# Altium PCB motherboardfutong.PcbDoc
Units mil, origin at the board's own origin, x right, y up, seen from the top; angles counter-clockwise.
Board outline 6000 x 4000 mil, 2 copper layers (Top Layer, Bottom Layer); 46 components, 53 nets, 314 pads, 70 vias.
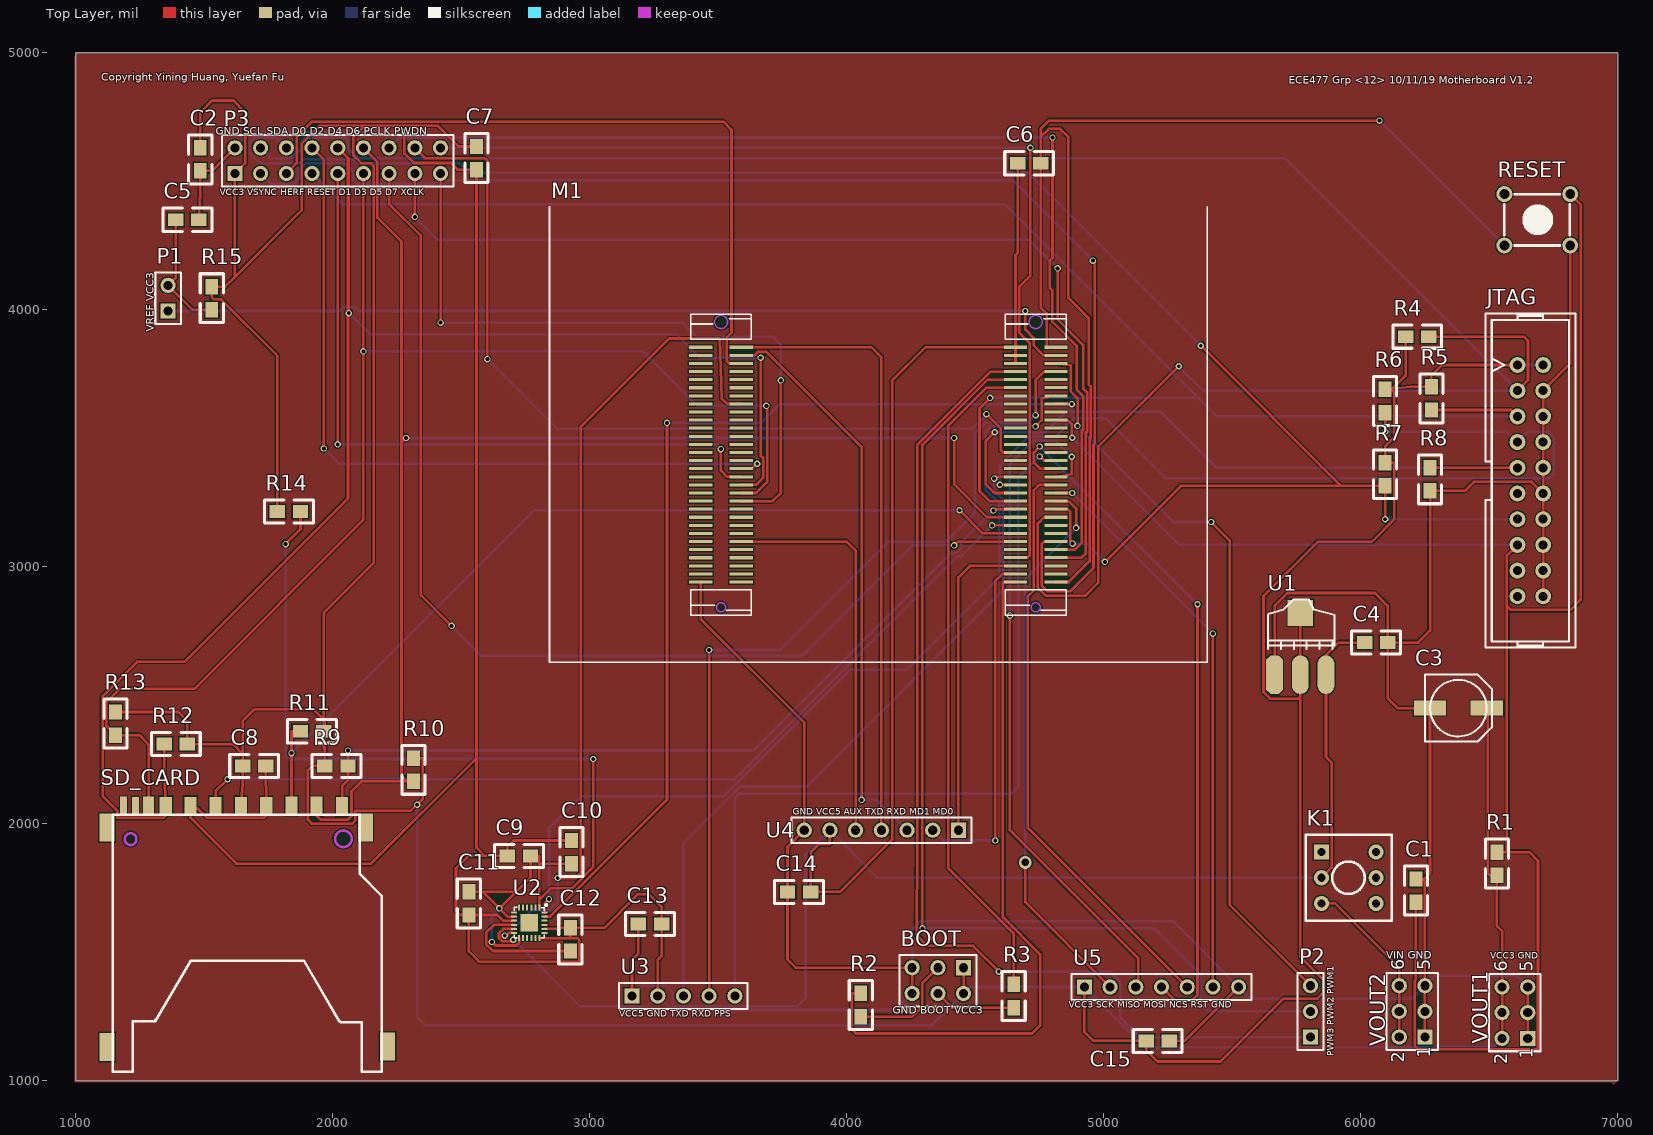
[diagram p0: Top Layer view]
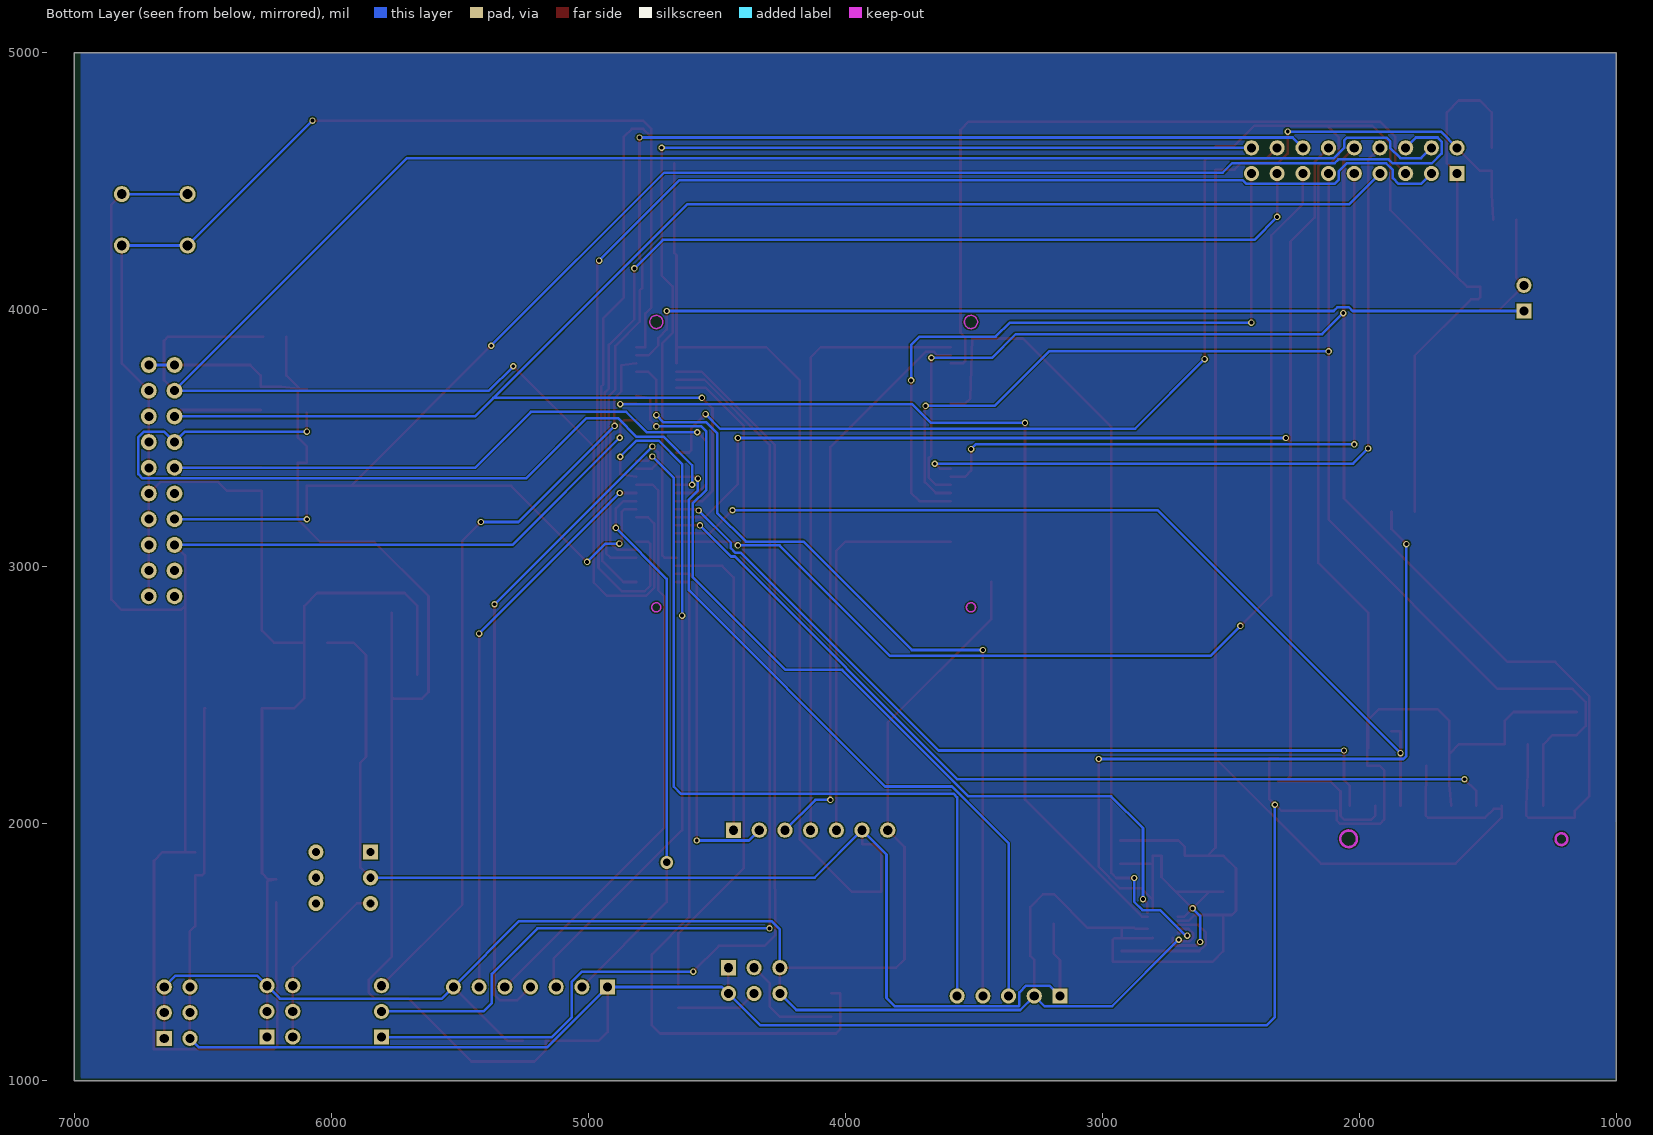
[diagram p1: Bottom Layer view, seen from below]

## Layer stack, top to bottom
Top Solder: solder mask 0.4, Solder Resist, Dk 3.5
Top Layer: signal copper 1.4
Dielectric 1: dielectric 12.6, FR-4, Dk 4.8
Bottom Layer: signal copper 1.4
Bottom Solder: solder mask 0.4, Solder Resist, Dk 3.5

## Board outline
1000,1000 7000,1000 7000,5000 1000,5000

## Design rules (kind name [scope] priority, off if disabled: settings)
Clearance [All] p1: gap=5 ignorepadtopadclearanceinfootprint=TRUE except(0: Arc-Hole Track-Hole SMDPad-Hole THPad-Hole Via-Hole Fill-Hole Poly-Hole Region-Hole Text-Hole)
ComponentClearance [All] p1: gap=6 collisioncheckmode=3 verticalgap=10 showdistances=FALSE
ParallelSegment ParallelSegment_2 [InNetClass('dcmi') vs InNetClass('dcmi')] p1: limit=10000 gap=10
ParallelSegment ParallelSegment_1 [InNetClass('sdio') vs InNetClass('sdio')] p2: limit=10000 gap=10
ParallelSegment [InNetClass('spi') vs InNetClass('spi')] p3: limit=10000 gap=10
PolygonConnect [All] p1: connectstyle=Relief reliefconductorwidth=10 reliefentries=4 polygonreliefangle="90 Angle" airgapwidth=10
RoutingVias [All] p1: holewidth=15 width=25 viastyle="Through Hole" minholewidth=15 minwidth=25 maxholewidth=15 maxwidth=25
SolderMaskExpansion [All] p1: expansion=4
Width [All] p1: maxlimit=10 minlimit=10 preferedwidth=10
29 further rules are at their usual default settings.

## Components (designator, comment, footprint, x,y, rotation, side; value= is the part's Value field where it differs from the comment)
BOOT "BOOT" HDR2X3 4455,1440 r180 top
C1 "104" 0805 6214.94,1695 r90 top
C2 "104" 0805 1484.94,4540 r90 top
C3 "220uF" CC6.56.5 6380,2450 r180 top
C4 "104" 0805 6015,2705.06 r0 top
C5 "6pF" 0805 1480,4350 r180 top
C6 "104" 0805 4755,4569.94 r180 top
C7 "104" 0805 2560.06,4635 r270 top
C8 "104" 0805 1740,2224.94 r180 top
C9 "104" 0805 2680,1875 r0 top
C10 "104" 0805 2930.06,1935 r270 top
C11 "104" 0805 2530,1645 r90 top
C12 "104" 0805 2925.06,1595 r270 top
C13 "104" 0805 3280,1609.94 r180 top
C14 "104" 0805 3770,1735.06 r0 top
C15 "104" 0805 5165,1155.06 r0 top
JTAG "JTAG" JTAG_20 6660,3335 r270 top
K1 "BUTTON" BTN8.5*8.5 5847.4,1890 r0 top
M1 "STM32F4&F7_CB" STM32F4&F7_CB 4814.39,3854.02 r180 top
P1 "VREF_SEL" HDR1X2 1360,3995 r90 top
P2 "PWM" HDR1X3 5805,1170 r90 top
P3 "OV5640" HDR2X9 1620,4530 r0 top
R1 "0R" 0805 6530,1890 r270 top
R2 "10K" 0805 4055.06,1340 r270 top
R3 "10K" 0805 4649.94,1285 r90 top
R4 "10K" 0805 6175,3895.06 r0 top
R5 "10K" 0805 6275.06,3700 r270 top
R6 "10K" 0805 6095,3690 r270 top
R7 "10K" 0805 6095.06,3405 r270 top
R8 "10K" 0805 6269.94,3295 r90 top
R9 "47K" 0805 2060,2224.94 r180 top
R10 "47K" 0805 2314.94,2165 r90 top
R11 "47K" 0805 1875,2360 r0 top
R12 "47K" 0805 1345,2310.06 r0 top
R13 "47K" 0805 1154.94,2345 r90 top
R14 "10R" 0805 1875,3215 r180 top
R15 "10R" 0805 1530,4000 r90 top
RESET "KEY_M" KEY_M 6559.09,4450 r0 top
SD_CARD "sd card" SDCARD_L 1938,2070 r0 top
U1 "AMS1117-3.3" AMS1117 5664.97,2580.06 r0 top
U2 "MPU9250" QFN24-t 2804.5,1674 r270 top
U3 "GPS" HDR1X5 3165,1330 r0 top
U4 "AS61-T17" HDR1X7 4435,1975 r180 top
U5 "ESP8266SPI" HDR1X7 4925,1365 r0 top
VOUT1 "VCC3.3" HDR2X3 6650,1165 r90 top
VOUT2 "VCC5" HDR2X3 6250,1170 r90 top

## Footprints (in the part's own frame and the unit in brackets; to place one, negate y for a bottom-side part, rotate by r counter-clockwise, add the part's x,y. Pads: shape width x height; smd on the part's side, far side on the other; paste and mask are expansions set on the pad)
0805 [mil]
  rect 60x50 smd: 1(0,-0.06) 2(90,-0.06)
  silkscreen extent -50,-45 140,45
AMS1117 [mil]
  oct 65x150 smd: 1(0.03,-0.06)
  oval 65x150 smd: 2(100.03,-0.06) 3(200.03,-0.06)
  rect 100x100 smd: 4(100.03,239.94)
  silkscreen extent -26,100 234,293
BTN8.5*8.5 [mm]
  rect 1.5x1.5 hole 0.8: 1(0,0)
  round 1.5 hole 0.8: 2(0,-2.54) 3(0,-5.08) 4(5.4,-5.08) 5(5.4,-2.54) 6(5.4,0)
  silkscreen extent -1.55,-6.79 6.95,1.71
CC6.56.5 [mm]
  rect 3.2x1.5 smd: 1(-2.794,0) 2(2.8,0)
  silkscreen extent -3.3,-3.3 3.3,3.3
HDR1X2 [mm]
  rect 1.5x1.5 hole 0.9: 1(0,0)
  round 1.5 hole 0.9: 2(2.54,0)
  silkscreen extent -1.27,-1.27 3.81,1.27
HDR1X3 [mm] "Connector; Header; 3 Position"
  rect 1.5x1.5 hole 0.9: 1(0,0)
  round 1.5 hole 0.9: 2(2.54,0) 3(5.08,0)
  silkscreen extent -1.27,-1.27 6.35,1.27
HDR1X5 [mm] "Connector; Header; 5 Position"
  rect 1.5x1.5 hole 0.9: 1(0,0)
  round 1.5 hole 0.9: 2(2.54,0) 3(5.08,0) 4(7.62,0) 5(10.16,0)
  silkscreen extent -1.27,-1.27 11.43,1.27
HDR1X7 [mm] "Connector; Header; 7 Position"
  rect 1.5x1.5 hole 0.9: 1(0,0)
  round 1.5 hole 0.9: 2(2.54,0) 3(5.08,0) 4(7.62,0) 5(10.16,0) 6(12.7,0) 7(15.24,0)
  silkscreen extent -1.27,-1.27 16.51,1.27
HDR2X3 [mm]
  rect 1.5x1.5 hole 0.9: 1(0,0)
  round 1.5 hole 0.9: 2(0,2.54) 3(2.54,0) 4(2.54,2.54) 5(5.08,0) 6(5.08,2.54)
  silkscreen extent -1.27,-1.27 6.35,3.81
HDR2X9 [mm]
  rect 1.5x1.5 hole 0.9: 1(0,0)
  round 1.5 hole 0.9: 2(0,2.54) 3(2.54,0) 4(2.54,2.54) 5(5.08,0) 6(5.08,2.54) 7(7.62,0) 8(7.62,2.54) 9(10.16,0) 10(10.16,2.54) 11(12.7,0) 12(12.7,2.54) 13(15.24,0) 14(15.24,2.54) 15(17.78,0) 16(17.78,2.54) 17(20.32,0) 18(20.32,2.54)
  silkscreen extent -1.27,-1.27 21.59,3.81
JTAG_20 [mil]
  round 62 hole 35: 1(-450,-50) 2(-450,50) 3(-350,-50) 4(-350,50) 5(-250,-50) 6(-250,50) 7(-150,-50) 8(-150,50) 9(-50,-50) 10(-50,50) 11(50,-50) 12(50,50) 13(150,-50) 14(150,50) 15(250,-50) 16(250,50) 17(350,-50) 18(350,50) 19(450,-50) 20(450,50)
  silkscreen extent -650,-175 650,175
KEY_M [mil]
  round 62 hole 38: 1(0,0) 1(255.91,0) 2(0,-200) 2(255.91,-200)
  silkscreen extent 0,-200 255,0
QFN24-t [mm]
  rrect50% 0.6x0.2 smd: 1(0,0) 2(0,-0.4) 3(0,-0.8) 4(0,-1.2) 5(0,-1.6) 6(0,-2) 13(3,-2) 14(3,-1.6) 15(3,-1.2) 16(3,-0.8) 17(3,-0.4) 18(3,0)
  rrect50% 0.2x0.6 smd: 7(0.5,-2.5) 8(0.9,-2.5) 9(1.3,-2.5) 10(1.7,-2.5) 11(2.1,-2.5) 12(2.5,-2.5) 19(2.5,0.5) 20(2.1,0.5) 21(1.7,0.5) 22(1.3,0.5) 23(0.9,0.5) 24(0.5,0.5)
  rect 1.7x1.7 smd: 25(1.499,-1.003)
  silkscreen extent -0.36,-2.5 3,0.76
SDCARD_L [mm]
  rect 1.2x1.8 smd: 1(0,0) 2(-2.489,0) 3(-4.983,-0.009) 4(-7.483,-0.009) 5(-9.983,-0.009) 6(-12.483,-0.009) 7(-14.908,-0.009) 9(2.517,-0.009)
  rect 1.1x1.8 smd: 8(-16.612,0)
  rect 0.7x1.8 smd: 10(-17.908,-0.009) 12(-19.101,0)
  rect 1.5x2.8 smd: 11(-20.726,-23.834) 11(-20.726,-2.143) 11(4.826,-2.143) 11(7.01,-23.784)
  Keep-Out Layer circle w0.254: c2.642,-3.26 r0.82
  Keep-Out Layer circle w0.254: c-18.39,-3.3 r0.58
  silkscreen extent -20.13,-26.3 6.44,-0.9
STM32F4&F7_CB [mm]
  rect 2.3x0.3 smd: J1_1(0,0) J1_2(0,0.8) J1_3(0,1.6) J1_4(0,2.4) J1_5(0,3.2) J1_6(0,4) J1_7(0,4.8) J1_8(0,5.6) J1_9(0,6.4) J1_10(0,7.2) J1_11(0,8) J1_12(0,8.8) J1_13(0,9.6) J1_14(0,10.4) J1_15(0,11.2) J1_16(0,12) J1_17(0,12.8) J1_18(0,13.6) J1_19(0,14.4) J1_20(0,15.2) J1_21(0,16) J1_22(0,16.8) J1_23(0,17.6) J1_24(0,18.4) J1_25(0,19.2) J1_26(0,20) J1_27(0,20.8) J1_28(0,21.6) J1_29(0,22.4) J1_30(0,23.2) J1_31(4,23.2) J1_32(4,22.4) J1_33(4,21.6) J1_34(4,20.8) J1_35(4,20) J1_36(4,19.2) J1_37(4,18.4) J1_38(4,17.6) J1_39(4,16.8) J1_40(4,16) J1_41(4,15.2) J1_42(4,14.4) J1_43(4,13.6) J1_44(4,12.8) J1_45(4,12) J1_46(4,11.2) J1_47(4,10.4) J1_48(4,9.6) J1_49(4,8.8) J1_50(4,8) J1_51(4,7.2) J1_52(4,6.4) J1_53(4,5.6) J1_54(4,4.8) J1_55(4,4) J1_56(4,3.2) J1_57(4,2.4) J1_58(4,1.6) J1_59(4,0.8) J1_60(4,0) J2_1(31.1,0.001) J2_2(31.1,0.801) J2_3(31.1,1.601) J2_4(31.1,2.401) J2_5(31.1,3.201) J2_6(31.1,4.001) J2_7(31.1,4.801) J2_8(31.1,5.601) J2_9(31.1,6.401) J2_10(31.1,7.201) J2_11(31.1,8.001) J2_12(31.1,8.801) J2_13(31.1,9.601) J2_14(31.1,10.401) J2_15(31.1,11.201) J2_16(31.1,12.001) J2_17(31.1,12.801) J2_18(31.1,13.601) J2_19(31.1,14.401) J2_20(31.1,15.201) J2_21(31.1,16.001) J2_22(31.1,16.801) J2_23(31.1,17.601) J2_24(31.1,18.401) J2_25(31.1,19.201) J2_26(31.1,20.001) J2_27(31.1,20.801) J2_28(31.1,21.601) J2_29(31.1,22.401) J2_30(31.1,23.201) J2_31(35.1,23.201) J2_32(35.1,22.401) J2_33(35.1,21.601) J2_34(35.1,20.801) J2_35(35.1,20.001) J2_36(35.1,19.201) J2_37(35.1,18.401) J2_38(35.1,17.601) J2_39(35.1,16.801) J2_40(35.1,16.001) J2_41(35.1,15.201) J2_42(35.1,14.401) J2_43(35.1,13.601) J2_44(35.1,12.801) J2_45(35.1,12.001) J2_46(35.1,11.201) J2_47(35.1,10.401) J2_48(35.1,9.601) J2_49(35.1,8.801) J2_50(35.1,8.001) J2_51(35.1,7.201) J2_52(35.1,6.401) J2_53(35.1,5.601) J2_54(35.1,4.801) J2_55(35.1,4.001) J2_56(35.1,3.201) J2_57(35.1,2.401) J2_58(35.1,1.601) J2_59(35.1,0.801) J2_60(35.1,0.001)
  Keep-Out Layer circle w0.152: c33.1,25.701 r0.45
  Keep-Out Layer circle w0.152: c33.1,-2.499 r0.65
  Keep-Out Layer circle w0.152: c2,-2.5 r0.65
  Keep-Out Layer circle w0.152: c2,25.7 r0.45
  silkscreen extent -14.95,-13.87 50.05,31.13

## Part data
BOOT VOUT1 VOUT2: library part "Header 3X2", "Header, 3-Pin, Dual row"
  VOUT1 VOUT2: LatestRevisionDate=17-Jul-2002, LatestRevisionNote="Re-released for DXP Platform.", Publisher="Altium Limited"
C1 C2 C4 C5 C6 C7 C8 C9 C10 C11 C12 C13 C14 C15: library part C
C3: library part CAP
M1: "F429/746 Core Board"
P1: library part "Header 2", "Header, 2-Pin"
P2: library part "Header 3", "Header, 3-Pin", LatestRevisionDate=17-Jul-2002, LatestRevisionNote="Re-released for DXP Platform.", Publisher="Altium Limited"
P3: library part "Header 9X2", "Header, 9-Pin, Dual row"
R1 R2 R3 R4 R5 R6 R7 R8 R9 R10 R11 R12 R13 R14 R15: library part R
U1: library part AMS1117
U2: "9轴运动处理传感器"
U3: library part "Header 5", "Header, 5-Pin", LatestRevisionDate=17-Jul-2002, LatestRevisionNote="Re-released for DXP Platform.", Publisher="Altium Limited"
U4 U5: library part "Header 7", "Header, 7-Pin", LatestRevisionDate=17-Jul-2002, LatestRevisionNote="Re-released for DXP Platform.", Publisher="Altium Limited"

## Via types
v1: diameter 25, hole 15, Top Layer to Bottom Layer, 69 vias
v2: diameter 50, hole 28, Top Layer to Bottom Layer, 1 vias

## Nets (pads, with @x,y where several pads share a name; then routed paths per layer and width w, separated by ;. In a path a pad name is that pad's centre, name@x,y a point inside that pad or via, vN(x,y) a via of type N, cw(c..) or ccw(c..) an arc to the next point about the centre after c; other vN are vias at no path point)
9D_INT: M1.J2_8 U2.12 | length 3227.8
  Top Layer w10: v1(2670,1565) 2676,1565 2686.57,1575.57 U2.12 ; v1(2876,1789) 2946,1789 2965,1808 2965,3544 3309,3888 3506,3888 3514,3655.5 3536,3633.5 M1.J2_8
  Bottom Layer w10: v1(2670,1565) 2676,1565 2775,1664 2844,1664 2876,1696 v1(2876,1789)
AS_AUX: M1.J2_25 U4.5 | length 1547.6
  Top Layer w10: M1.J2_25 4000,3098.07 4035,3063.07 U4.5
AS_MD0: M1.J1_33 U4.1 | length 1224.2
  Top Layer w10: U4.1 4435,2958.62 4480,3003.62 M1.J1_33
AS_MD1: M1.J1_32 U4.2 | length 1359.1
  Top Layer w10: v1(4578,1935) 4578,2944 4606.13,2972.13 M1.J1_32
  Bottom Layer w10: U4.2 4375,1935 v1(4578,1935)
AS_RXD: M1.J2_2 U4.3 | length 2225.6
  Top Layer w10: M1.J2_2 3641.46,3822.48 3654.92,3835.95 3687.98,3835.95 4058,3465.92 v1(4058,2093)
  Bottom Layer w10: v1(4058,2093) 4117,2093 U4.3
AS_TXD: M1.J2_1 U4.4 | length 2401.1
  Top Layer w10: M1.J2_1 4096,3853.98 4135,3814.98 U4.4
BOOT0: M1.J1_31 R2.1 | length 2761.5
  Top Layer w10: R2.1 4020,1340 4020,1200 4036,1184 4721,1184 4753,1216 4753,1492 4608,1637 4608,2940.63 M1.J1_31
BOOT1: M1.J1_55 R3.2 | length 2601.5
  Top Layer w10: R3.2 4650,1573 4395,1828 4395,3546.98 4544.55,3696.54 M1.J1_55
DCMI_D0: M1.J2_16 P3.8 | length 2969.6
  Top Layer w10: P3.8 1966,4584 v1(1966,3460) ; M1.J2_16 3632.54,3381.54 v1(3652,3401)
  Bottom Layer w10: v1(1966,3460) 2025,3401 v1(3652,3401)
DCMI_D1: M1.J2_17 P3.9 | length 2725.4
  Top Layer w10: v1(2020,3476) P3.9 ; v1(3511,3458) 3511,3374.04 3535,3350.04 M1.J2_17
  Bottom Layer w10: v1(2020,3476) 3493,3476 v1(3511,3458)
DCMI_D2: M1.J2_18 P3.10 R12.1 SD_CARD.7 | length 6467
  Top Layer w10: R12.1 1345,2196.07 SD_CARD.7 1351.07,2032 1343.07,2024 1162,2024 1162,2051 1105,2108 1105,2496 1239,2630 1424,2630 2060,3266 2060,4590 ; P3.10 2060,4590 ; v1(2063,3987) 2063,4587 2060,4590 ; M1.J2_18 3648,3318.54 3675.28,3345.82 3675.28,3423.26 3665,3433.53 v1(3665,3813)
  Bottom Layer w10: v1(2063,3987) 2145,3905 3337,3905 3429,3813 v1(3665,3813)
DCMI_D3: M1.J2_19 P3.11 R13.1 SD_CARD.8 | length 5238.3
  Top Layer w10: SD_CARD.8 1284,2309 1248,2345 R13.1 1120,2380 1120,2474 1171,2525 1462,2525 2120,3183 v1(2120,3838) P3.11 ; M1.J2_19 3648,3287.05 3690.28,3329.32 3690.28,3623.72 v1(3688,3626)
  Bottom Layer w10: v1(2120,3838) 3207,3838 3419,3626 v1(3688,3626)
DCMI_D4: M1.J1_39 P3.12 R10.1 SD_CARD.1 | length 5704.4
  Top Layer w10: SD_CARD.1 1938,2032 1955,2015 2058,2015 2073.47,2030.47 2073.47,2126.47 2112,2165 2288,2165 ; P3.12 2174.53,4575.47 2174.53,4358.47 2268,4265 2268,3483 ; v1(2286,3501) 2268,3483 ; R10.1 2288,2165 ; v1(4418,3501) 4418,3321.25 4546.65,3192.6 M1.J1_39 ; 2268,3483 2268,2185 2288,2165
  Bottom Layer w10: v1(2286,3501) v1(4418,3501)
DCMI_D5: M1.J1_36 P3.13 | length 4287.4
  Top Layer w10: P3.13 2220,4412 2343,4289 2343,2890 v1(2463,2770) ; v1(4418,3083) 4433.11,3098.11 M1.J1_36
  Bottom Layer w10: v1(2463,2770) 2580,2653 3826,2653 4256,3083 v1(4418,3083)
DCMI_D6: M1.J1_26 P3.14 | length 4345.9
  Top Layer w10: v1(4801,4670) 4801,4202 4791,4192 4791,4084 4800,4075 4800,3954 4895,3859 4895,3689.5 4920.5,3664 4920.5,3534 4915.5,3529 4915.5,3094 4888.11,3066.61 M1.J1_26
  Bottom Layer w10: P3.14 2260,4670 v1(4801,4670)
DCMI_D7: M1.J1_27 P3.15 | length 4034.9
  Top Layer w10: v1(2320,4361) P3.15 ; M1.J1_27 4914.43,3035.12 4930.5,3051.19 4930.5,3520.5 4935.5,3525.5 4935.5,3678.5 4920.5,3693.5 4920.5,3863.5 4821,3963 v1(4821,4161)
  Bottom Layer w10: v1(2320,4361) 2409,4272 4710,4272 v1(4821,4161)
DCMI_HREF: M1.J2_3 P3.5 | length 2855.9
  Top Layer w10: P3.5 1860,4570 1860,4672 1920,4732 3520,4732 3552,4700 3552,3911 3534,3893 3534,3800 3543.02,3790.98 M1.J2_3
DCMI_PCLK: M1.J1_47 P3.16 | length 3377.4
  Top Layer w10: P3.16 2360,4590 2592,4590 2602,4580 v1(2602,3808) ; v1(4544,3594) 4599,3539 4599,3453.57 4608,3444.57 M1.J1_47
  Bottom Layer w10: v1(2602,3808) 2873,3537 4487,3537 v1(4544,3594)
DCMI_PWDN: M1.J1_34 P3.18 | length 3974.8
  Top Layer w10: M1.J1_34 4704,3035.12 4712.19,3043.31 4712.19,3869.81 4672,3910 4672,4091 4715,4134 v1(4715,4630)
  Bottom Layer w10: P3.18 v1(4715,4630)
DCMI_RESET: JTAG.5 M1.J1_41 P3.7 R5.2 | length 6772.9
  Top Layer w10: v1(4558.14,3657) 4517.01,3615.87 4517.01,3294.99 4556.41,3255.59 M1.J1_41 ; R5.2 6585,3610 JTAG.5
  Bottom Layer w10: P3.7 2039,4411 4615,4411 5369,3657 ; v1(4558.14,3657) 5369,3657 ; JTAG.5 5441,3585 5369,3657
DCMI_SCL: JTAG.3 M1.J1_22 P3.4 R4.2 | length 8912.2
  Top Layer w10: M1.J1_22 4767.6,3192.6 4744,3169 4744,2918 4775,2887 4928,2887 4979,2938 4979,3467 v1(5292,3780) ; R4.2 6635,3895 6651,3879 6651,3726 JTAG.3
  Bottom Layer w10: P3.4 1760,4590 1840.94,4590 1880.47,4629.53 1880.47,4656 1894,4669.53 2048,4669.53 2059.53,4658 2059.53,4629.53 2099.06,4590 5705,4590 JTAG.3 5387,3685 v1(5292,3780)
DCMI_SDA: JTAG.13 M1.J1_21 P3.6 R7.2 | length 7200.8
  Top Layer w10: M1.J1_21 4860,3224.09 4869.67,3214.42 4869.67,3099.33 v1(4879,3090) ; v1(5005,3019) 5301,3315 5923,3315 ; v1(5378,3860) 5923,3315 ; v1(6095,3185) R7.2 5923,3315
  Bottom Layer w10: P3.6 1780,4670 1696,4670 1680,4654 1680,4608 1718,4570 1871,4570 1886,4585 2082,4585 2097,4570 2495,4570 2532,4533 4705,4533 v1(5378,3860) ; v1(4879,3090) 4934,3090 v1(5005,3019) ; v1(6095,3185) JTAG.13
DCMI_VSYNC: M1.J1_25 P3.3 | length 5163.9
  Top Layer w10: M1.J1_25 4768,3098.11 4759,3089.11 4759,2927 4780.5,2905.5 4870.5,2905.5 4960.5,2995.5 4960.5,3475.5 4965.5,3480.5 4965.5,4183.5 v1(4958,4191)
  Bottom Layer w10: P3.3 1760,4490 1848,4490 1870,4512 1870,4544 1895.53,4569.53 2050,4569.53 2080,4539.53 2080,4506 2096,4490 2440,4490 2454,4504 4645,4504 v1(4958,4191)
DCMI_XCLK: M1.J2_20 P3.17 | length 2682.7
  Top Layer w10: v1(2420,3950) P3.17 ; M1.J2_20 3712,3255.55 3744,3287.55 v1(3744,3725)
  Bottom Layer w10: v1(2420,3950) 3360,3950 3415,3895 3712,3895 3744,3863 v1(3744,3725)
GND: BOOT.5 BOOT.6 C1.2 C2.1 C3.2 C4.2 C5.1 C6.1 C7.2 C8.1 C9.1 C10.1 C11.1 C12.1 C13.1 C14.1 C15.2 JTAG.4 JTAG.6 JTAG.8 JTAG.10 JTAG.12 JTAG.14 JTAG.16 JTAG.18 JTAG.20 M1.J1_1 M1.J1_30 M1.J2_31 P3.2 R8.1 RESET.2 SD_CARD.3 SD_CARD.6 U1.1 U2.9 U2.11 U2.18 U2.20 U3.2 U4.7 U5.7 VOUT1.1 VOUT1.3 VOUT1.5 VOUT2.1 VOUT2.3 VOUT2.5 | length 26555.8
  Top Layer w10: SD_CARD.6 SD_CARD.6@1446.54,2058 ; C5.1 1485,4450 C2.1 1530,4540 P3.2 ; C8.1 1740,2147.82 1741.82,2146 SD_CARD.3 1741.82,2032 1733.82,2024 1511,2024 1477,2058 SD_CARD.6@1446.54,2058 ; v1(2279,4693) 2279,4608 2316,4571 2460,4571 2486,4545 C7.2 2560,2255 ; v1(2703,1549) 2696.5,1542.5 2660.68,1542.5 2647.5,1555.68 2647.5,1574.32 2664.5,1591.32 U2.11 ; U2.9 2663.36,1622.82 2641.18,1645 C11.1 ; U2.18 2804.5,1555 2925,1555 ; U2.20 2872,1591.32 2875.68,1595 C12.1 ; C10.1 2704,1935 2680,1911 C9.1 2592,1874.94 ; U3.2 3265,1470 3280,1485 C13.1 3280,1677 3232,1725 3187,1725 3057,1595 C12.1 ; M1.J2_31 3432,2940.59 3432,2797 3835,2394 U4.7 3770,1910 C14.1 3770,1472 3802,1440 BOOT.5 BOOT.6 ; M1.J1_30 4864,2940.63 4945.5,3022.13 4945.5,3499.34 4950.5,3504.34 4950.5,3700.5 4941.66,3709.34 4941.66,3967.34 4863,4046 4863,4672 4831,4704 4787,4704 4755,4672 ; M1.J1_1 4777.78,3854.02 4777.78,3986 4755,4008.78 C6.1 4755,4672 ; C15.2 5315,1155 U5.7 ; U1.1 5665,2848 5715,2898 6055,2898 6105,2848 C4.2 ; v1(6073.09,4736) 4787,4736 4755,4704 4755,4672 ; VOUT2.1 VOUT2.3 VOUT2.5 6250,1776 ; VOUT1.1 VOUT1.3 VOUT1.5 ; JTAG.20 JTAG.18 JTAG.16 JTAG.14 JTAG.12 ; RESET.2@6815,4250 6815,3790 JTAG.4 JTAG.6 JTAG.8 JTAG.10 JTAG.12 ; SD_CARD.6@1446.54,2058 1446.54,2024 1625.54,1845 2150,1845 2560,2255 ; C11.1 2496,1645 2480,1661 2480,1827 2527.94,1874.94 2592,1874.94 ; C11.1 2530.06,1504 2571.06,1463 2960,1463 2960,1547 2952,1555 2925,1555 ; 2560,2255 2560,1906.94 2592,1874.94 ; 2925,1555 C12.1 ; C4.2 6105,2489 6144,2450 C3.2 6269.76,1808 6243.88,1782.12 ; C4.2 6223,2705 6270,2752 R8.1 6405,3295 6440,3330 6665,3330 JTAG.12 ; 6243.88,1782.12 6250,1776 ; 6243.88,1782.12 6241,1785 C1.2 6250,1776
  Bottom Layer w10: P3.2 1683,4693 v1(2279,4693) ; v1(2703,1549) 2962,1290 3225,1290 U3.2 3319.53,1275.47 4190.47,1275.47 BOOT.6 ; BOOT.5 4255,1588 4288,1621 5269,1621 U5.7 5570,1320 6200,1320 VOUT2.5 6289,1409 6606,1409 VOUT1.5 ; v1(6073.09,4736) 6559.09,4250 RESET.2@6815,4250
GPS_PPS: M1.J1_15 U3.5 | length 3281.9
  Top Layer w10: v1(4751,3429.07) 4767,3413.07 M1.J1_15
  Bottom Layer w10: U3.5 3565,2103 3578.16,2116.16 4639.16,2116.16 4667,2144 4667,3345.07 v1(4751,3429.07)
GPS_RXD: M1.J1_4 U3.4 | length 3405.8
  Top Layer w10: U3.4 v1(3465,2676) ; v1(4735,3590) 4735,3726.53 4768,3759.53 M1.J1_4
  Bottom Layer w10: v1(3465,2676) 3741,2676 4163,3098 4387,3098 4499,3210 4499,3520 4541,3562 4707,3562 v1(4735,3590)
GPS_TXD: M1.J1_44 U3.3 | length 2781.7
  Top Layer w10: v1(4573.5,3343.08) 4580.5,3350.08 M1.J1_44
  Bottom Layer w10: U3.3 3365,1925 3585,2145 3845,2145 4609.03,2909.03 4609.03,3260.97 4573.5,3296.5 v1(4573.5,3343.08)
IIC_SCL: M1.J1_8 U2.23 | length 3798.8
  Top Layer w10: U2.23 2846,1638.57 3301,2093.57 v1(3301,3560) ; M1.J1_8 4875.46,3633.54 v1(4876,3633)
  Bottom Layer w10: v1(3301,3560) 3666.87,3560 3739.87,3633 v1(4876,3633)
IIC_SDA: M1.J1_7 U2.24 | length 3460.6
  Top Layer w10: U2.24 2825,1654.32 2825,1690 v1(2842,1707) ; v1(4735,3546) 4759.12,3570.12 4759.12,3656.16 M1.J1_7
  Bottom Layer w10: v1(2842,1707) 2842,1983 2966,2107 3521,2107 4012.86,2598.86 4232.86,2598.86 4594.03,2960.03 4594.03,3245.97 4540.5,3299.5 4540.5,3526.5 4560,3546 v1(4735,3546)
JTCK: JTAG.9 M1.J1_42 R8.2 | length 2843.5
  Top Layer w10: v1(4576,3523.5) 4540.5,3488 4540.5,3322.64 4576.06,3287.09 M1.J1_42 ; R8.2 JTAG.9
  Bottom Layer w10: v1(4576,3523.5) 4773.5,3523.5 4852.5,3602.5 5223,3602.5 5440.5,3385 JTAG.9
JTMS: JTAG.7 M1.J1_43 R6.2 | length 3388.6
  Top Layer w10: v1(4596,3319) 4596.42,3318.58 M1.J1_43 ; v1(6094.94,3526) R6.2
  Bottom Layer w10: v1(4596,3319) 4596,3395 4706.5,3505.5 4812.5,3505.5 4885,3578 5008,3578 5242,3344 6735,3344 6751,3360 6751,3504 6729,3526 6651,3526 JTAG.7 6569,3526 v1(6094.94,3526)
NetBOOT_3: BOOT.3 R2.2 | length 432
  Top Layer w10: R2.2 4256,1250 4295,1289 4295,1380 BOOT.3
NetBOOT_4: BOOT.4 R3.1 | length 317.8
  Top Layer w10: BOOT.4 4410,1285 R3.1
NetC5_2: C5.2 P1.2 R15.1 | length 476.9
  Top Layer w10: C5.2 1390,4125 P1.2 1455,4000 R15.1
NetC9_2: C9.2 C10.2 C11.2 R14.1 U2.1 U2.8 U2.13 | length 4096.5
  Top Layer w10: v1(1817,3088) 1875,3146 R14.1 ; C11.2 2584.57,1735 ; v1(2620,1540) 2633.5,1526.5 2716.26,1526.5 2725.76,1536 U2.13 ; v1(2649,1671) 2713,1735 ; U2.8 2681,1638.57 2584.57,1735 ; U2.1 2804.5,1705.5 ; C10.2 2804.5,1845 ; v1(3014,2252) 3014,1832 2931,1749 2848,1749 2804.5,1705.5 ; 2584.57,1735 2713,1735 ; 2713,1735 2770,1792 C9.2 2804.5,1874.94 2804.5,1845 ; 2804.5,1705.5 2804.5,1845
  Bottom Layer w10: v1(1817,3088) 1817,2264 1829,2252 v1(3014,2252) ; v1(2620,1540) 2620,1642 v1(2649,1671)
NetC12_2: C12.2 U2.10 | length 505.8
  Top Layer w10: U2.10 2627.07,1607.07 2597.5,1577.5 2597.5,1530.68 2623.18,1505 C12.2
PWM1: M1.J1_57 P2.1 | length 4185
  Top Layer w10: v1(4592,1425) 4492,1525 4315,1525 4272,1568 4275,1924 4275,3475.21 4559.31,3759.53 M1.J1_57
  Bottom Layer w10: v1(4592,1425) 5024,1425 5065,1384 5065,1247 5142,1170 P2.1
PWM2: M1.J1_56 P2.2 | length 4058.1
  Top Layer w10: v1(4295,1593) 4295,3474 4549.03,3728.03 M1.J1_56
  Bottom Layer w10: v1(4295,1593) 5198,1593 5375,1416 5375,1303 5408,1270 P2.2
PWM3: M1.J1_3 P2.3 | length 2943.6
  Top Layer w10: M1.J1_3 4871.89,3783.14 4871.89,3682.11 4898.5,3655.5 4898.5,3548.5 v1(4898,3548) ; v1(5418,3174) 5490,3102 5490,1685 P2.3
  Bottom Layer w10: v1(4898,3548) 5272,3174 v1(5418,3174)
RESET: C1.1 JTAG.15 M1.J1_10 R1.1 RESET.1 | length 7356.9
  Top Layer w10: M1.J1_10 4860,3570.55 4875,3555.55 4875,3504.94 v1(4878,3501.94) ; C1.1 6215,1394 6210,1389 6210,1136 6224,1122 6690,1122 6690,1856 6656,1890 6563,1890 ; R1.1 6563,1890 ; JTAG.15 6569,3044 6569,2848 ; RESET.1@6815,4450 6856,4409 6856,2872 6816,2832 6585,2832 6569,2848 ; 6563,1890 6569,1896 6569,2848
  Bottom Layer w10: v1(4878,3501.94) 5294.94,3085 JTAG.15 ; RESET.1@6559.09,4450 RESET.1@6815,4450
SDIO_CMD: M1.J1_37 R11.1 SD_CARD.2 | length 3570.7
  Top Layer w10: SD_CARD.2 v1(1840,2275) 1840,2359.94 R11.1 ; v1(4439,3220) 4529.39,3129.61 M1.J1_37
  Bottom Layer w10: v1(1840,2275) 2785,3220 v1(4439,3220)
SDIO_D2: M1.J1_40 R9.1 SD_CARD.9 | length 3223.3
  Top Layer w10: SD_CARD.9 2037.09,2147 2060,2169.91 R9.1 v1(2060,2285) ; v1(4571,3219) 4576.09,3224.09 M1.J1_40
  Bottom Layer w10: v1(2060,2285) 3637,2285 4407.07,3055.07 4428.49,3055.07 4445.42,3072 4445.42,3093.42 v1(4571,3219)
SDIO_SCK: M1.J1_38 SD_CARD.5 | length 3597.6
  Top Layer w10: SD_CARD.5 1544.97,2127 v1(1590.97,2173) ; v1(4565.62,3161.1) M1.J1_38
  Bottom Layer w10: v1(1590.97,2173) 3562.9,2173 4429.88,3039.98 4444.49,3039.98 v1(4565.62,3161.1)
SPI_CS: M1.J1_18 U5.5 | length 2294.8
  Top Layer w10: M1.J1_18 4749,3318.58 4728,3297.58 4728,2908 4704,2884 4704,1986 U5.5
SPI_MISO: M1.J1_17 U5.3 | length 2680.7
  Top Layer w10: v1(4635,2810) 4635,1975 5135,1475 5135,1375 U5.3 ; M1.J1_17 4876,3360 v1(4876,3428)
  Bottom Layer w10: v1(4635,2810) 4635,3399.5 4726,3490.5 4813.5,3490.5 v1(4876,3428)
SPI_MOSI: M1.J1_16 U5.4 | length 2726.5
  Top Layer w10: v1(4751,3468) 4728.43,3445.43 4728.43,3405.15 4752,3381.57 M1.J1_16 ; U5.4 5277,1313 5344,1313 5365,1334 v1(5365,2854)
  Bottom Layer w10: v1(4751,3468) v1(5365,2854)
SPI_RESET: M1.J1_19 U5.6 | length 2212.3
  Top Layer w10: M1.J1_19 v1(4878,3287.09) ; U5.6 v1(5425,2740.09)
  Bottom Layer w10: v1(4878,3287.09) v1(5425,2740.09)
SPI_SCK: M1.J1_20 U5.2 | length 2170.9
  Top Layer w10: v2(4695,1850) 4695,1695 U5.2 ; M1.J1_20 4864,3255.59 4893,3226.59 v1(4893,3151)
  Bottom Layer w10: v2(4695,1850) 4695,2953 v1(4893,3151)
VBTN: K1.3 VOUT2.2 VOUT2.4 VOUT2.6 | length 676.7
  Top Layer w10: K1.3 5901,1690 6150,1441 VOUT2.6 VOUT2.4 VOUT2.2
VCC3.3: BOOT.1 BOOT.2 C2.2 C3.1 C7.1 C8.2 C15.1 JTAG.1 JTAG.2 P3.1 R1.2 R4.1 R5.1 R6.1 R7.1 R9.2 R10.2 R11.2 R12.2 R13.2 R14.2 R15.2 SD_CARD.4 U1.2 U1.4 U5.1 VOUT1.2 VOUT1.4 VOUT1.6 | length 20683.7
  Top Layer w10: R13.2 1400,2435 1435,2400 R12.2 1612,2310 1650,2272 ; C2.2 1485,4768 1531,4814 1614,4814 1660,4768 1660,4570 P3.1 1620,4128 ; SD_CARD.4 1650,2154.61 C8.2 1650,2272 ; R14.2 1785,3821 1566,4040 1538.06,4040 1530.06,4048 R15.2 1582,4090 1620,4128 ; R10.2 2350,2255 2350,2097 ; v1(2329,2074) 2350,2095 2350,2097 ; C7.1 2490,4635 2409,4716 2126,4716 ; BOOT.2 BOOT.1 ; U5.1 4925,1190 4960,1155 C15.1 5165,1120 5210,1075 5455,1075 5700,1320 5831,1320 5855,1344 5855,1392 5765,1482 5765,2496 ; U1.4 U1.2 5765,2496 ; R4.1 6175,3744 6123.89,3692.89 ; C3.1 6494,2450 6494,1808 6502,1800 R1.2 6529.94,1602.06 6550,1582 VOUT1.6 VOUT1.4 VOUT1.2 ; JTAG.1 6316,3785 6275,3744 R5.1 6195,3700 6123.89,3692.89 ; 1620,4128 1880,4388 1880,4646 1950,4716 2126,4716 ; 1650,2272 1650,2400 1696,2446 1924,2446 1965,2405 ; 1965,2405 1965,2820 2159.53,3014.53 2159.53,4560 2149.53,4570 2112,4570 2080,4602 2080,4670 2126,4716 ; 1965,2405 R11.2 1965,2294 1970,2289 ; 1965,2405 1970,2400 1970,2289 ; 1970,2289 R9.2 1920,2225 1904,2209 1904,2016 1920,2000 2074.79,2000 2088.47,2013.68 2088.47,2051 2304,2051 2350,2097 ; 5765,2496 5756,2487 5647,2487 5622,2512 5622,2886 5833,3097 6043,3097 6130,3184 6130,3405 R7.1 6095,3467 6130,3502 6130,3680 6120.5,3689.5 ; R6.1 6123.89,3692.89 ; R6.1 6120.5,3689.5 ; R6.1 6120,3690 6120.5,3689.5 ; 6120.5,3689.5 6123.89,3692.89
  Bottom Layer w10: v1(2329,2074) 2329,1248 2361,1216 4331,1216 BOOT.2 4480,1365 U5.1 5160,1130 6515,1130 VOUT1.2 ; JTAG.1 JTAG.2
VCC5: C4.1 C6.2 C13.2 C14.2 K1.2 M1.J1_58 M1.J1_59 M1.J1_60 U1.3 U3.1 U4.6 | length 8599.3
  Top Layer w10: U3.1 3165,1470 3190,1495 C13.2 ; U4.6 3935,1921 3893,1921 3860,1888 C14.2 3974,1735 4177,1938 4177,3724 4307.02,3854.02 M1.J1_60 ; M1.J1_58 M1.J1_59 M1.J1_60 ; C6.2 4665,4220.09 4656.91,4212 M1.J1_60 ; K1.2 5887,1829.6 5887,2238 5865,2260 U1.3 5865,2656 5914,2705 C4.1
  Bottom Layer w10: U3.1 3205,1370 3297,1370 3323,1344 3323,1293.47 3326,1290.47 3808,1290.47 3840,1322.47 3840,1880 U4.6 4120,1790 K1.2
VREF+: M1.J1_2 P1.1 | length 3597.2
  Top Layer w10: v1(4695,3995) 4695,3923 4727.19,3890.81 4727.19,3861.81 4766.48,3822.52 M1.J1_2
  Bottom Layer w10: P1.1 2026.32,3995 2041,4009.68 2085.54,4009.68 2100.22,3995 v1(4695,3995)
pads on no net: JTAG.11 JTAG.17 JTAG.19 K1.1 K1.4 K1.5 K1.6 M1.J1_5 M1.J1_6 M1.J1_9 M1.J1_11 M1.J1_12 M1.J1_13 M1.J1_14 M1.J1_23 M1.J1_24 M1.J1_28 M1.J1_29 M1.J1_35 M1.J1_45 M1.J1_46 M1.J1_48 M1.J1_49 M1.J1_50 M1.J1_51 M1.J1_52 M1.J1_53 M1.J1_54 M1.J2_4 M1.J2_5 M1.J2_6 M1.J2_7 M1.J2_9 M1.J2_10 M1.J2_11 M1.J2_12 M1.J2_13 M1.J2_14 M1.J2_15 M1.J2_21 M1.J2_22 M1.J2_23 M1.J2_24 M1.J2_26 M1.J2_27 M1.J2_28 M1.J2_29 M1.J2_30 M1.J2_32 M1.J2_33 M1.J2_34 M1.J2_35 M1.J2_36 M1.J2_37 M1.J2_38 M1.J2_39 M1.J2_40 M1.J2_41 M1.J2_42 M1.J2_43 M1.J2_44 M1.J2_45 M1.J2_46 M1.J2_47 M1.J2_48 M1.J2_49 M1.J2_50 M1.J2_51 M1.J2_52 M1.J2_53 M1.J2_54 M1.J2_55 M1.J2_56 M1.J2_57 M1.J2_58 M1.J2_59 M1.J2_60 SD_CARD.10 SD_CARD.11 SD_CARD.12 U2.2 U2.3 U2.4 U2.5 U2.6 U2.7 U2.14 U2.15 U2.16 U2.17 U2.19 U2.21 U2.22 U2.25

## Polygon pours and split planes (outlines as drawn)
no net on Bottom Layer "Bottom Layer-No Net" (solid, pour order 4): 3250,770
no net on Bottom Layer "Bottom Layer-No Net 1" (solid, pour order 2): 1000,5000 6975,5000 6975,1015 6980,1010 1005,1010
no net on Top Layer "Top Layer-No Net" (solid, pour order 0): 1005,5005 1015,4995 6995,4995 6995,995 6985,985 6975,995 995,995 995,4985 1000,4990

## Silkscreen, mask and mechanical layers (free items; w line width, h text height)
Top Overlay:
  text "Copyright Yining Huang, Yuefan Fu" at 1100,4890 h30
  text "ECE477 Grp <12> 10/11/19 Motherboard V1.2" at 5720,4880 h30
  text "GND SCL SDA D0 D2 D4 D6 PCLK PWDN" at 1545,4680 h30
  text "VCC3 VSYNC HERF RESET D1 D3 D5 D7 XCLK" at 1560,4445 h25
  text "VREF VCC3" at 1305,3915 h30 r90
  text "GND VCC5 AUX TXD RXD MD1 MD0" at 3790,2035 h25
  text "VIN GND" at 6100,1475 h30
  text "VCC3 GND" at 6505,1475 h25
  text "VCC3 SCK MISO MOSI NCS RST GND" at 4865,1285 h25
  text "GND BOOT VCC3" at 4180,1260 h30
  text "VCC5 GND TXD RXD PPS" at 3115,1250 h25
  text "PWM3 PWM2 PWM1" at 5895,1095 h25 r90

## Text inside footprints (layer, text, board x,y; h text height)
VOUT1: Top Overlay "1" at 6670,1085 h50 r90; Top Overlay "2" at 6570,1065 h50 r90; Top Overlay "5" at 6670,1425 h50 r90; Top Overlay "6" at 6570,1425 h50 r90
VOUT2: Top Overlay "1" at 6270,1090 h50 r90; Top Overlay "2" at 6170,1070 h50 r90; Top Overlay "5" at 6270,1430 h50 r90; Top Overlay "6" at 6170,1430 h50 r90